# EAGLE board Front_right_lamp_v2 (EAGLE 7.3.0)
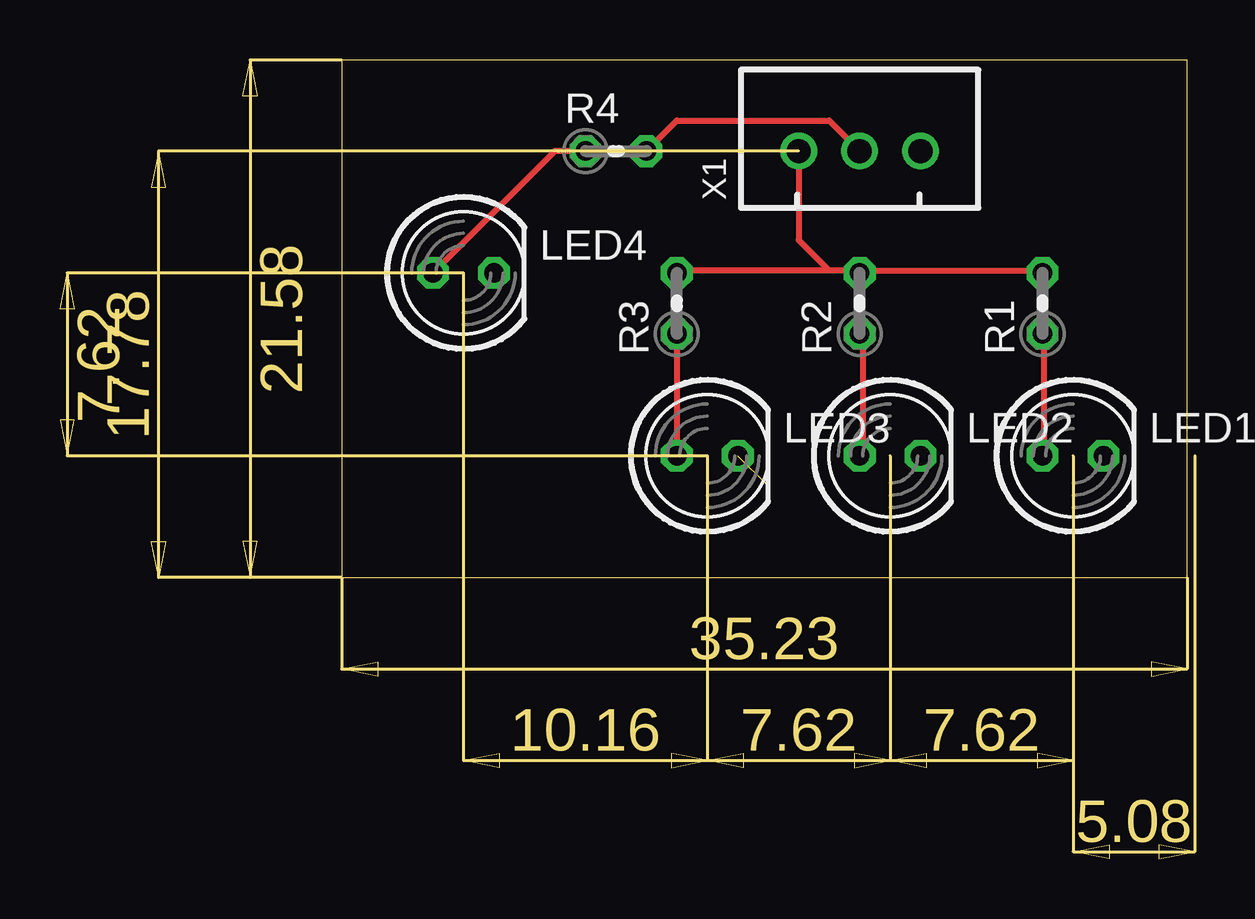
[diagram p0: board, top side]
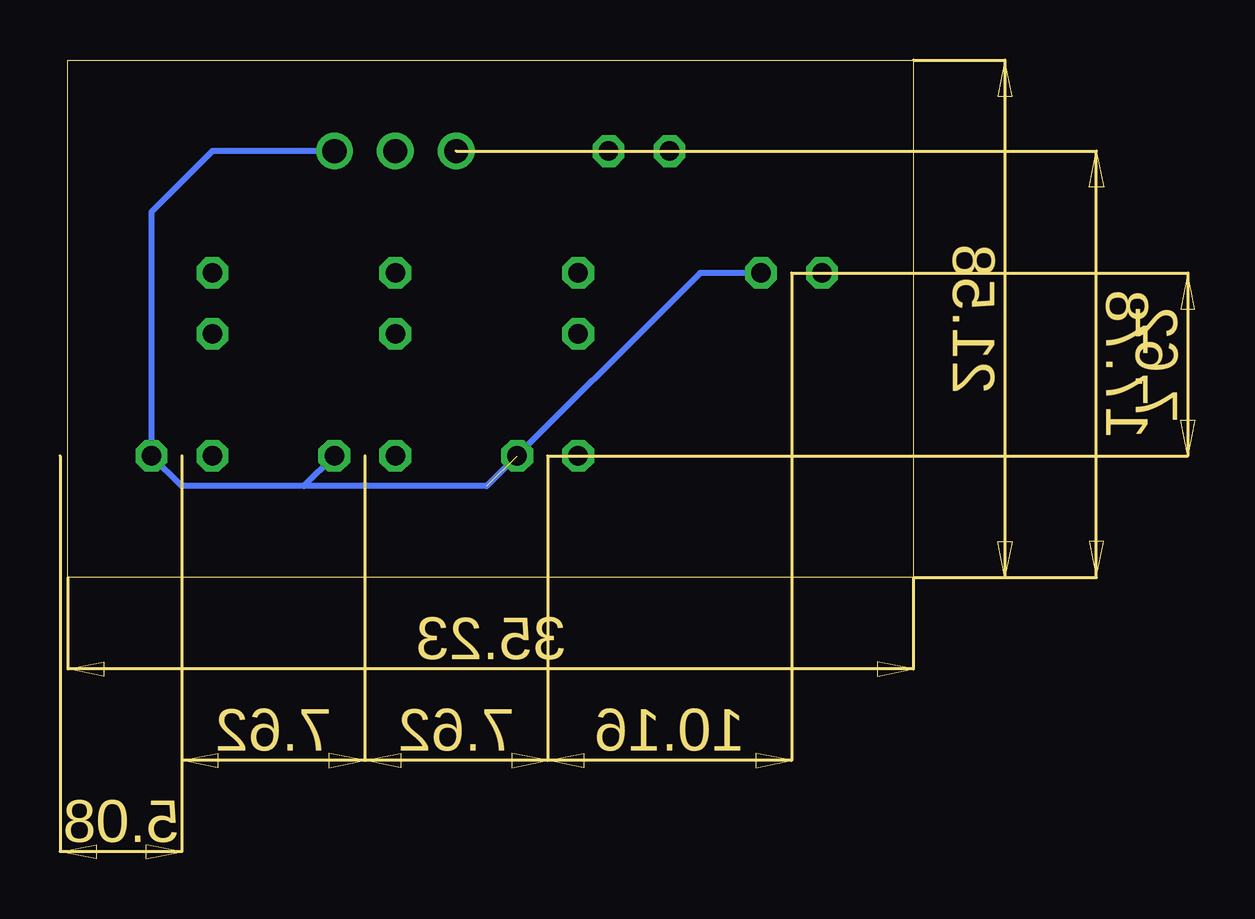
[diagram p1: board, bottom side, seen from below]

Size 35.23 x 21.58 mm. Coordinates in mm from the lower left corner, seen from the top.
Outline: 0,0 35.23,0 35.23,21.58 0,21.58 0,0
Copper layers (1*16): Top 0.035mm / dielectric 1.5mm / Bottom 0.035mm
Design rules "default": minimum track width 10mil, minimum drill 24mil, track to track 8mil, track to pad 8mil, pad to pad 8mil, via to via 8mil, smd to smd 8mil, copper to edge 40mil, drill to drill 8mil, minimum pad ring 10mil, minimum via ring 8mil, stop-mask expansion 4mil, vias tented up to drill 0mil, thermal gap 10mil

## Footprints (pad centres in the part's own frame; a part is rotated, then mirrored left to right if it is on the bottom)
LED5MM = drill 0.813 octagon: A -1.27,0; K 1.27,0
0204V = drill 0.813 octagon: 1 -1.27,0; 2 1.27,0
JST-XH-03-PACKAGE-ROUND-PAD = drill 1.016: 1 -2.54,0; 2 0,0; 3 2.54,0

## Placement (x,y rotation side)
LED1  2.58 V  [LED5MM]  30.48,5.08 0 top
LED2  2.58 V  [LED5MM]  22.86,5.08 0 top
LED3  2.58 V  [LED5MM]  15.24,5.08 0 top
LED4  1.88 V  [LED5MM]  5.08,12.7 0 top
R1  4K7  [0204V]  29.21,11.43 90 top
R2  4K7  [0204V]  21.59,11.43 90 top
R3  4K7  [0204V]  13.97,11.43 90 top
R4  680  [0204V]  11.43,17.78 0 top
X1  JST-XH-03-PIN-ROUND-PAD  [JST-XH-03-PACKAGE-ROUND-PAD]  21.59,17.78 0 top

## Library data of the parts
LED1-LED3 = led; COLOR: White; CURRENT: 0.14 mA
LED4 = led; COLOR: Yellow; CURRENT: 1.42 mA
R1-R4 = resistor
X1 = Rembrandt Electronics - JST XH Connectors v1-0

## Nets
API_START_ENGINE: R1.2 R2.2 R3.2 X1.1
API_TURN_RIGHT: R4.2 X1.2
GND: LED1.K LED2.K LED3.K LED4.K X1.3
N$1: LED1.A R1.1
N$2: LED2.A R2.1
N$3: LED3.A R3.1
N$4: LED4.A R4.1

## Tracks (layer width: path | path; a pad name or v marks a point on that pad's centre or on a via)
API_START_ENGINE
  Top 0.254: 20.32,12.8 21.49,12.8 R2.2 21.72,12.8 29.03,12.8 R1.2 | 20.32,12.8 14.17,12.8 R3.2 | X1.1 19.05,14.07 20.32,12.8
API_TURN_RIGHT
  Top 0.254: R4.2 13.97,19.05 20.32,19.05 X1.2
GND  (1 unrouted)
  Bottom 0.254: LED4.K 8.89,12.7 17.78,3.81 25.4,3.81 | 25.4,3.81 30.48,3.81 LED1.K 31.75,15.24 29.21,17.78 X1.3 | LED2.K 25.4,3.81
N$1
  Top 0.254: LED1.A 29.26,5.26 29.26,10.06 R1.1
N$2
  Top 0.254: LED2.A 21.72,5.26 21.72,10.06 R2.1
N$3
  Top 0.254: R3.1 LED3.A
N$4
  Top 0.254: R4.1 8.89,17.78 LED4.A